# Altium PCB TP-SENSOR-15x10-CH-R01.PcbDoc (part 2 of 2)
Units mm, origin at the board's own origin, x right, y up, seen from the top; angles counter-clockwise.
Board outline 129.4 x 79.4 mm, 2 copper layers (Top Layer, Bottom Layer), stack 0.98 mm thick; 26 components, 26 nets, 61 pads, 358 vias.
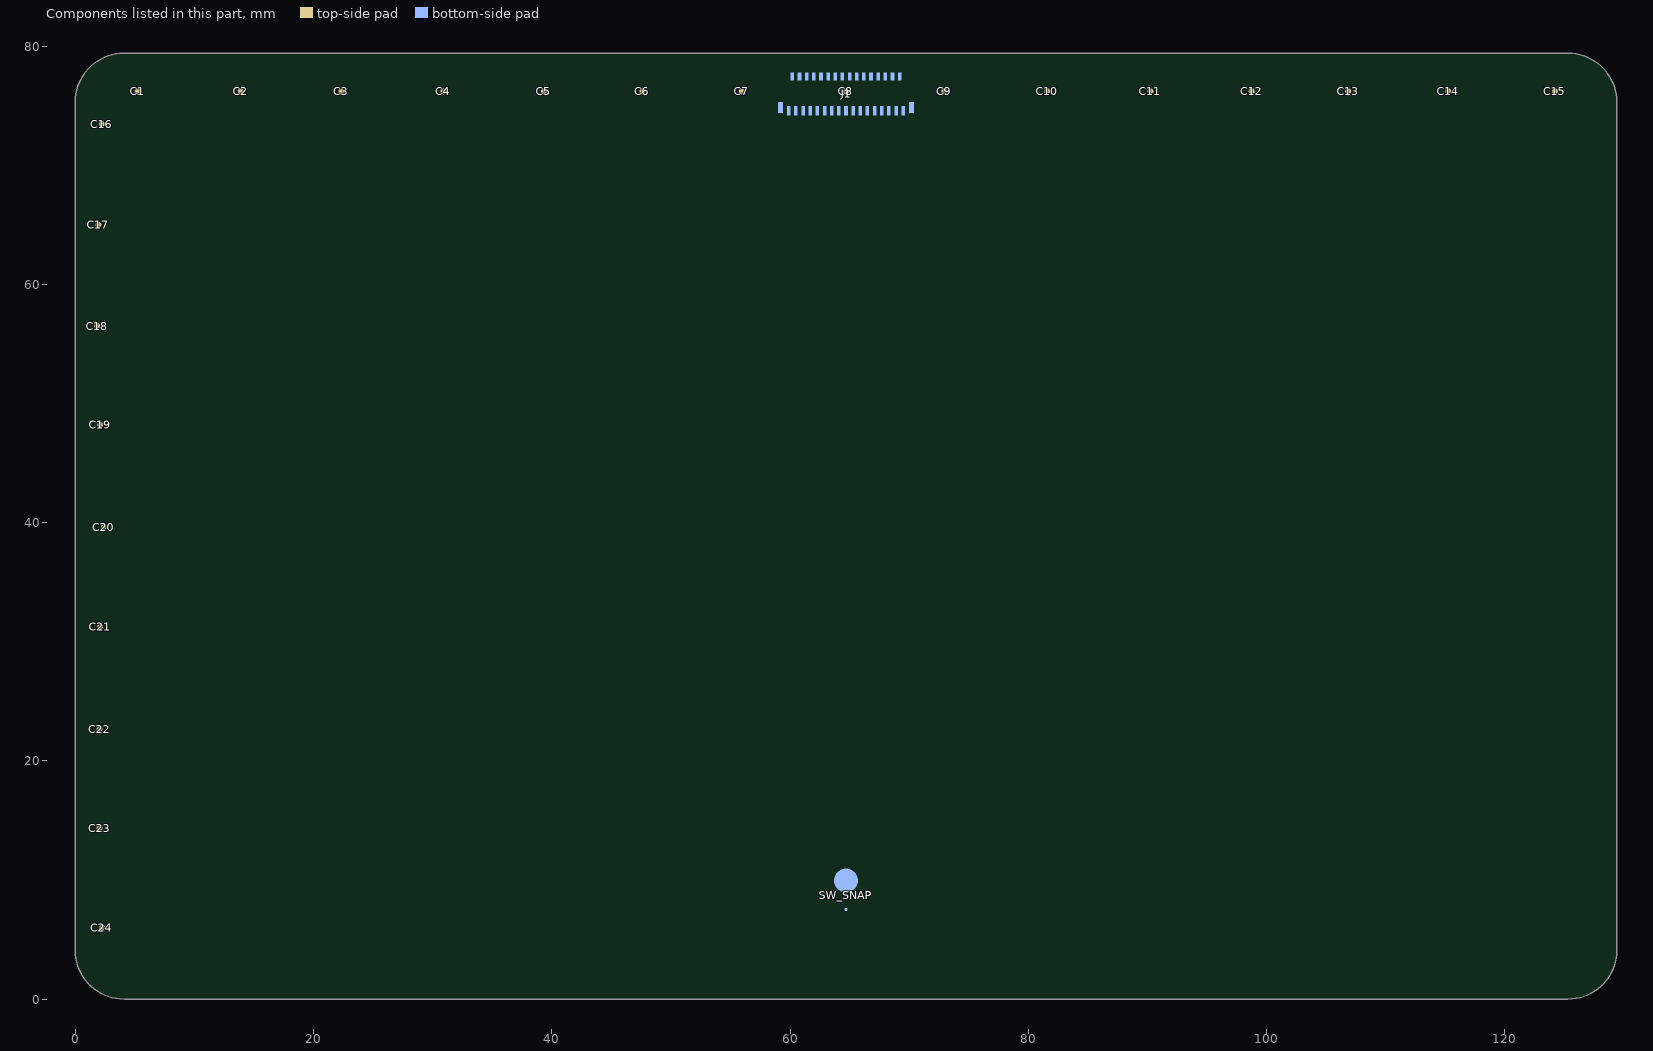
[diagram p2: the components of this part, seen from the top]

## Polygon pours and split planes (outlines as drawn) (continued)
TP-SENS-TX10 on Top Layer "NONET_L04_P-001" (solid, pour order 252): 90.201,64.901 86.251,60.952 86.251,60.95 86.252,60.95 90.201,57.001 94.15,60.95 94.151,60.95
TP-SENS-TX9 on Top Layer "NONET_L04_P-001" (solid, pour order 249): 77.751,77.949 81.7,74 81.702,74 85.651,77.949
TP-SENS-TX9 on Top Layer "NONET_L04_P-001" (solid, pour order 248): 81.701,13.901 77.751,9.952 77.751,9.95 77.752,9.95 81.701,6.001 85.65,9.95 85.651,9.95
TP-SENS-TX9 on Top Layer "NONET_L04_P-001" (solid, pour order 247): 81.701,22.401 77.751,18.452 77.751,18.45 77.752,18.45 81.701,14.501 85.65,18.45 85.651,18.45
TP-SENS-TX9 on Top Layer "NONET_L04_P-001" (solid, pour order 246): 81.701,30.901 77.751,26.952 77.751,26.95 77.752,26.95 81.701,23.001 85.65,26.95 85.651,26.95
TP-SENS-TX9 on Top Layer "NONET_L04_P-001" (solid, pour order 245): 81.701,39.401 77.751,35.452 77.751,35.45 77.752,35.45 81.701,31.501 85.65,35.45 85.651,35.45
TP-SENS-TX9 on Top Layer "NONET_L04_P-001" (solid, pour order 244): 81.701,47.901 77.751,43.952 77.751,43.95 77.752,43.95 81.701,40.001 85.65,43.95 85.651,43.95
TP-SENS-TX9 on Top Layer "NONET_L04_P-001" (solid, pour order 243): 81.701,56.401 77.751,52.452 77.751,52.45 77.752,52.45 81.701,48.501 85.65,52.45 85.651,52.45
TP-SENS-TX9 on Top Layer "NONET_L04_P-001" (solid, pour order 241): 81.701,73.4 77.751,69.451 77.751,69.449 77.752,69.449 81.701,65.5 85.65,69.449 85.651,69.449
TP-SENS-TX8 on Top Layer "NONET_L04_P-001" (solid, pour order 240): 69.242,1.421 73.19,5.369 73.193,5.369 77.142,1.42
TP-SENS-TX8 on Top Layer "NONET_L04_P-001" (solid, pour order 239): 69.251,77.949 73.2,74 73.202,74 77.151,77.949
TP-SENS-TX8 on Top Layer "NONET_L04_P-001" (solid, pour order 238): 73.201,13.901 69.251,9.952 69.251,9.95 69.252,9.95 73.201,6.001 77.15,9.95 77.151,9.95
TP-SENS-TX8 on Top Layer "NONET_L04_P-001" (solid, pour order 237): 73.201,22.401 69.251,18.452 69.251,18.45 69.252,18.45 73.201,14.501 77.15,18.45 77.151,18.45
TP-SENS-TX8 on Top Layer "NONET_L04_P-001" (solid, pour order 236): 73.201,30.901 69.251,26.952 69.251,26.95 69.252,26.95 73.201,23.001 77.15,26.95 77.151,26.95
TP-SENS-TX8 on Top Layer "NONET_L04_P-001" (solid, pour order 235): 73.201,39.401 69.251,35.452 69.251,35.45 69.252,35.45 73.201,31.501 77.15,35.45 77.151,35.45
TP-SENS-TX8 on Top Layer "NONET_L04_P-001" (solid, pour order 234): 73.201,47.901 69.251,43.952 69.251,43.95 69.252,43.95 73.201,40.001 77.15,43.95 77.151,43.95
TP-SENS-TX8 on Top Layer "NONET_L04_P-001" (solid, pour order 233): 73.201,56.401 69.251,52.452 69.251,52.45 69.252,52.45 73.201,48.501 77.15,52.45 77.151,52.45
TP-SENS-TX8 on Top Layer "NONET_L04_P-001" (solid, pour order 232): 73.201,64.901 69.251,60.952 69.251,60.95 69.252,60.95 73.201,57.001 77.15,60.95 77.151,60.95
TP-SENS-TX8 on Top Layer "NONET_L04_P-001" (solid, pour order 231): 73.201,73.4 69.251,69.451 69.251,69.449 69.252,69.449 73.201,65.5 77.15,69.449 77.151,69.449
TP-SENS-TX7 on Top Layer "NONET_L04_P-001" (solid, pour order 230): 60.742,1.421 64.69,5.369 64.693,5.369 68.642,1.42
TP-SENS-TX7 on Top Layer "NONET_L04_P-001" (solid, pour order 229): 60.751,77.949 64.7,74 64.702,74 68.651,77.949
TP-SENS-TX7 on Top Layer "NONET_L04_P-001" (solid, pour order 227): 64.701,22.401 60.751,18.452 60.751,18.45 60.752,18.45 64.701,14.501 68.65,18.45 68.651,18.45
TP-SENS-TX7 on Top Layer "NONET_L04_P-001" (solid, pour order 226): 64.701,30.901 60.751,26.952 60.751,26.95 60.752,26.95 64.701,23.001 68.65,26.95 68.651,26.95
TP-SENS-TX7 on Top Layer "NONET_L04_P-001" (solid, pour order 225): 64.701,39.401 60.751,35.452 60.751,35.45 60.752,35.45 64.701,31.501 68.65,35.45 68.651,35.45
TP-SENS-TX7 on Top Layer "NONET_L04_P-001" (solid, pour order 224): 64.701,47.901 60.751,43.952 60.751,43.95 60.752,43.95 64.701,40.001 68.65,43.95 68.651,43.95
TP-SENS-TX7 on Top Layer "NONET_L04_P-001" (solid, pour order 223): 64.701,56.401 60.751,52.452 60.751,52.45 60.752,52.45 64.701,48.501 68.65,52.45 68.651,52.45
TP-SENS-TX7 on Top Layer "NONET_L04_P-001" (solid, pour order 222): 64.701,64.901 60.751,60.952 60.751,60.95 60.752,60.95 64.701,57.001 68.65,60.95 68.651,60.95
TP-SENS-TX6 on Top Layer "NONET_L04_P-001" (solid, pour order 220): 52.242,1.421 56.19,5.369 56.193,5.369 60.142,1.42
TP-SENS-TX6 on Top Layer "NONET_L04_P-001" (solid, pour order 219): 52.251,77.949 56.2,74 56.202,74 60.151,77.949
TP-SENS-TX6 on Top Layer "NONET_L04_P-001" (solid, pour order 217): 56.201,22.401 52.251,18.452 52.251,18.45 52.252,18.45 56.201,14.501 60.15,18.45 60.151,18.45
TP-SENS-TX6 on Top Layer "NONET_L04_P-001" (solid, pour order 216): 56.201,30.901 52.251,26.952 52.251,26.95 52.252,26.95 56.201,23.001 60.15,26.95 60.151,26.95
TP-SENS-TX6 on Top Layer "NONET_L04_P-001" (solid, pour order 215): 56.201,39.401 52.251,35.452 52.251,35.45 52.252,35.45 56.201,31.501 60.15,35.45 60.151,35.45
TP-SENS-TX6 on Top Layer "NONET_L04_P-001" (solid, pour order 214): 56.201,47.901 52.251,43.952 52.251,43.95 52.252,43.95 56.201,40.001 60.15,43.95 60.151,43.95
TP-SENS-TX6 on Top Layer "NONET_L04_P-001" (solid, pour order 213): 56.201,56.401 52.251,52.452 52.251,52.45 52.252,52.45 56.201,48.501 60.15,52.45 60.151,52.45
TP-SENS-TX6 on Top Layer "NONET_L04_P-001" (solid, pour order 212): 56.201,64.901 52.251,60.952 52.251,60.95 52.252,60.95 56.201,57.001 60.15,60.95 60.151,60.95
TP-SENS-TX6 on Top Layer "NONET_L04_P-001" (solid, pour order 211): 56.201,73.4 52.251,69.451 52.251,69.449 52.252,69.449 56.201,65.5 60.15,69.449 60.151,69.449
TP-SENS-TX5 on Top Layer "NONET_L04_P-001" (solid, pour order 210): 43.742,1.421 47.69,5.369 47.693,5.369 51.642,1.42
TP-SENS-TX5 on Top Layer "NONET_L04_P-001" (solid, pour order 209): 43.751,77.949 47.7,74 47.702,74 51.651,77.949
TP-SENS-TX5 on Top Layer "NONET_L04_P-001" (solid, pour order 208): 47.701,13.901 43.751,9.952 43.751,9.95 43.752,9.95 47.701,6.001 51.65,9.95 51.651,9.95
TP-SENS-TX5 on Top Layer "NONET_L04_P-001" (solid, pour order 207): 47.701,22.401 43.751,18.452 43.751,18.45 43.752,18.45 47.701,14.501 51.65,18.45 51.651,18.45
TP-SENS-TX5 on Top Layer "NONET_L04_P-001" (solid, pour order 206): 47.701,30.901 43.751,26.952 43.751,26.95 43.752,26.95 47.701,23.001 51.65,26.95 51.651,26.95
TP-SENS-TX5 on Top Layer "NONET_L04_P-001" (solid, pour order 205): 47.701,39.401 43.751,35.452 43.751,35.45 43.752,35.45 47.701,31.501 51.65,35.45 51.651,35.45
TP-SENS-TX5 on Top Layer "NONET_L04_P-001" (solid, pour order 204): 47.701,47.901 43.751,43.952 43.751,43.95 43.752,43.95 47.701,40.001 51.65,43.95 51.651,43.95
TP-SENS-TX5 on Top Layer "NONET_L04_P-001" (solid, pour order 203): 47.701,56.401 43.751,52.452 43.751,52.45 43.752,52.45 47.701,48.501 51.65,52.45 51.651,52.45
TP-SENS-TX5 on Top Layer "NONET_L04_P-001" (solid, pour order 202): 47.701,64.901 43.751,60.952 43.751,60.95 43.752,60.95 47.701,57.001 51.65,60.95 51.651,60.95
TP-SENS-TX5 on Top Layer "NONET_L04_P-001" (solid, pour order 201): 47.701,73.4 43.751,69.451 43.751,69.449 43.752,69.449 47.701,65.5 51.65,69.449 51.651,69.449
TP-SENS-TX4 on Top Layer "NONET_L04_P-001" (solid, pour order 200): 35.242,1.421 39.19,5.369 39.193,5.369 43.142,1.42
TP-SENS-TX4 on Top Layer "NONET_L04_P-001" (solid, pour order 199): 35.251,77.949 39.2,74 39.202,74 43.151,77.949
TP-SENS-TX4 on Top Layer "NONET_L04_P-001" (solid, pour order 198): 39.201,13.901 35.251,9.952 35.251,9.95 35.252,9.95 39.201,6.001 43.15,9.95 43.151,9.95
TP-SENS-TX4 on Top Layer "NONET_L04_P-001" (solid, pour order 197): 39.201,22.401 35.251,18.452 35.251,18.45 35.252,18.45 39.201,14.501 43.15,18.45 43.151,18.45
TP-SENS-TX4 on Top Layer "NONET_L04_P-001" (solid, pour order 196): 39.201,30.901 35.251,26.952 35.251,26.95 35.252,26.95 39.201,23.001 43.15,26.95 43.151,26.95
TP-SENS-TX4 on Top Layer "NONET_L04_P-001" (solid, pour order 195): 39.201,39.401 35.251,35.452 35.251,35.45 35.252,35.45 39.201,31.501 43.15,35.45 43.151,35.45
TP-SENS-TX4 on Top Layer "NONET_L04_P-001" (solid, pour order 194): 39.201,47.901 35.251,43.952 35.251,43.95 35.252,43.95 39.201,40.001 43.15,43.95 43.151,43.95
TP-SENS-TX4 on Top Layer "NONET_L04_P-001" (solid, pour order 193): 39.201,56.401 35.251,52.452 35.251,52.45 35.252,52.45 39.201,48.501 43.15,52.45 43.151,52.45
TP-SENS-TX4 on Top Layer "NONET_L04_P-001" (solid, pour order 192): 39.201,64.901 35.251,60.952 35.251,60.95 35.252,60.95 39.201,57.001 43.15,60.95 43.151,60.95
TP-SENS-TX4 on Top Layer "NONET_L04_P-001" (solid, pour order 191): 39.201,73.4 35.251,69.451 35.251,69.449 35.252,69.449 39.201,65.5 43.15,69.449 43.151,69.449
TP-SENS-TX3 on Top Layer "NONET_L04_P-001" (solid, pour order 190): 26.742,1.421 30.69,5.369 30.693,5.369 34.642,1.42
TP-SENS-TX3 on Top Layer "NONET_L04_P-001" (solid, pour order 189): 26.751,77.949 30.7,74 30.702,74 34.651,77.949
TP-SENS-TX3 on Top Layer "NONET_L04_P-001" (solid, pour order 188): 30.701,13.901 26.751,9.952 26.751,9.95 26.752,9.95 30.701,6.001 34.65,9.95 34.651,9.95
TP-SENS-TX3 on Top Layer "NONET_L04_P-001" (solid, pour order 187): 30.701,22.401 26.751,18.452 26.751,18.45 26.752,18.45 30.701,14.501 34.65,18.45 34.651,18.45
TP-SENS-TX3 on Top Layer "NONET_L04_P-001" (solid, pour order 186): 30.701,30.901 26.751,26.952 26.751,26.95 26.752,26.95 30.701,23.001 34.65,26.95 34.651,26.95
TP-SENS-TX3 on Top Layer "NONET_L04_P-001" (solid, pour order 185): 30.701,39.401 26.751,35.452 26.751,35.45 26.752,35.45 30.701,31.501 34.65,35.45 34.651,35.45
TP-SENS-TX3 on Top Layer "NONET_L04_P-001" (solid, pour order 184): 30.701,47.901 26.751,43.952 26.751,43.95 26.752,43.95 30.701,40.001 34.65,43.95 34.651,43.95
TP-SENS-TX3 on Top Layer "NONET_L04_P-001" (solid, pour order 183): 30.701,56.401 26.751,52.452 26.751,52.45 26.752,52.45 30.701,48.501 34.65,52.45 34.651,52.45
TP-SENS-TX3 on Top Layer "NONET_L04_P-001" (solid, pour order 182): 30.701,64.901 26.751,60.952 26.751,60.95 26.752,60.95 30.701,57.001 34.65,60.95 34.651,60.95
TP-SENS-TX3 on Top Layer "NONET_L04_P-001" (solid, pour order 181): 30.701,73.4 26.751,69.451 26.751,69.449 26.752,69.449 30.701,65.5 34.65,69.449 34.651,69.449
TP-SENS-TX2 on Top Layer "NONET_L04_P-001" (solid, pour order 180): 18.242,1.421 22.19,5.369 22.193,5.369 26.142,1.42
TP-SENS-TX2 on Top Layer "NONET_L04_P-001" (solid, pour order 179): 18.251,77.949 22.2,74 22.202,74 26.151,77.949
TP-SENS-TX2 on Top Layer "NONET_L04_P-001" (solid, pour order 178): 22.201,13.901 18.251,9.952 18.251,9.95 18.252,9.95 22.201,6.001 26.15,9.95 26.151,9.95
TP-SENS-TX2 on Top Layer "NONET_L04_P-001" (solid, pour order 177): 22.201,22.401 18.251,18.452 18.251,18.45 18.252,18.45 22.201,14.501 26.15,18.45 26.151,18.45
TP-SENS-TX2 on Top Layer "NONET_L04_P-001" (solid, pour order 176): 22.201,30.901 18.251,26.952 18.251,26.95 18.252,26.95 22.201,23.001 26.15,26.95 26.151,26.95
TP-SENS-TX2 on Top Layer "NONET_L04_P-001" (solid, pour order 175): 22.201,39.401 18.251,35.452 18.251,35.45 18.252,35.45 22.201,31.501 26.15,35.45 26.151,35.45
TP-SENS-TX2 on Top Layer "NONET_L04_P-001" (solid, pour order 174): 22.201,47.901 18.251,43.952 18.251,43.95 18.252,43.95 22.201,40.001 26.15,43.95 26.151,43.95
TP-SENS-TX2 on Top Layer "NONET_L04_P-001" (solid, pour order 173): 22.201,56.401 18.251,52.452 18.251,52.45 18.252,52.45 22.201,48.501 26.15,52.45 26.151,52.45
TP-SENS-TX2 on Top Layer "NONET_L04_P-001" (solid, pour order 172): 22.201,64.901 18.251,60.952 18.251,60.95 18.252,60.95 22.201,57.001 26.15,60.95 26.151,60.95
TP-SENS-TX2 on Top Layer "NONET_L04_P-001" (solid, pour order 171): 22.201,73.4 18.251,69.451 18.251,69.449 18.252,69.449 22.201,65.5 26.15,69.449 26.151,69.449
TP-SENS-TX1 on Top Layer "NONET_L04_P-001" (solid, pour order 170): 9.742,1.421 13.69,5.369 13.693,5.369 17.642,1.42
TP-SENS-TX1 on Top Layer "NONET_L04_P-001" (solid, pour order 169): 9.751,77.949 13.7,74 13.702,74 17.651,77.949
TP-SENS-TX1 on Top Layer "NONET_L04_P-001" (solid, pour order 168): 13.701,13.901 9.751,9.952 9.751,9.95 9.752,9.95 13.701,6.001 17.65,9.95 17.651,9.95
TP-SENS-TX1 on Top Layer "NONET_L04_P-001" (solid, pour order 167): 13.701,22.401 9.751,18.452 9.751,18.45 9.752,18.45 13.701,14.501 17.65,18.45 17.651,18.45
TP-SENS-TX1 on Top Layer "NONET_L04_P-001" (solid, pour order 166): 13.701,30.901 9.751,26.952 9.751,26.95 9.752,26.95 13.701,23.001 17.65,26.95 17.651,26.95
TP-SENS-TX1 on Top Layer "NONET_L04_P-001" (solid, pour order 165): 13.701,39.401 9.751,35.452 9.751,35.45 9.752,35.45 13.701,31.501 17.65,35.45 17.651,35.45
TP-SENS-TX1 on Top Layer "NONET_L04_P-001" (solid, pour order 164): 13.701,47.901 9.751,43.952 9.751,43.95 9.752,43.95 13.701,40.001 17.65,43.95 17.651,43.95
TP-SENS-TX1 on Top Layer "NONET_L04_P-001" (solid, pour order 163): 13.701,56.401 9.751,52.452 9.751,52.45 9.752,52.45 13.701,48.501 17.65,52.45 17.651,52.45
TP-SENS-TX1 on Top Layer "NONET_L04_P-001" (solid, pour order 162): 13.701,64.901 9.751,60.952 9.751,60.95 9.752,60.95 13.701,57.001 17.65,60.95 17.651,60.95
TP-SENS-TX1 on Top Layer "NONET_L04_P-001" (solid, pour order 161): 13.701,73.4 9.751,69.451 9.751,69.449 9.752,69.449 13.701,65.5 17.65,69.449 17.651,69.449
TP-SENS-RX8 on Top Layer "NONET_L04_P-001" (solid, pour order 159): 115.999,5.699 119.948,1.749 119.95,1.749 123.899,5.699 119.95,9.648 119.95,9.649
TP-SENS-RX8 on Top Layer "NONET_L04_P-001" (solid, pour order 158): 107.499,5.699 111.448,1.749 111.45,1.749 115.399,5.699 111.45,9.648 111.45,9.649
TP-SENS-RX8 on Top Layer "NONET_L04_P-001" (solid, pour order 157): 98.999,5.699 102.948,1.749 102.95,1.749 106.899,5.699 102.95,9.648 102.95,9.649
TP-SENS-RX8 on Top Layer "NONET_L04_P-001" (solid, pour order 156): 90.499,5.699 94.448,1.749 94.45,1.749 98.399,5.699 94.45,9.648 94.45,9.649
TP-SENS-RX8 on Top Layer "NONET_L04_P-001" (solid, pour order 155): 81.999,5.699 85.948,1.749 85.95,1.749 89.899,5.699 85.95,9.648 85.95,9.649
TP-SENS-RX8 on Top Layer "NONET_L04_P-001" (solid, pour order 154): 73.499,5.699 77.448,1.749 77.45,1.749 81.399,5.699 77.45,9.648 77.45,9.649
TP-SENS-RX8 on Top Layer "NONET_L04_P-001" (solid, pour order 151): 47.999,5.699 51.948,1.749 51.95,1.749 55.899,5.699 51.95,9.648 51.95,9.649
TP-SENS-RX8 on Top Layer "NONET_L04_P-001" (solid, pour order 150): 39.499,5.699 43.448,1.749 43.45,1.749 47.399,5.699 43.45,9.648 43.45,9.649
TP-SENS-RX8 on Top Layer "NONET_L04_P-001" (solid, pour order 149): 30.999,5.699 34.948,1.749 34.95,1.749 38.899,5.699 34.95,9.648 34.95,9.649
TP-SENS-RX8 on Top Layer "NONET_L04_P-001" (solid, pour order 148): 22.499,5.699 26.448,1.749 26.45,1.749 30.399,5.699 26.45,9.648 26.45,9.649
TP-SENS-RX8 on Top Layer "NONET_L04_P-001" (solid, pour order 147): 13.999,5.699 17.948,1.749 17.95,1.749 21.899,5.699 17.95,9.648 17.95,9.649
TP-SENS-RX8 on Top Layer "NONET_L04_P-001" (solid, pour order 146): 5.499,5.699 9.448,1.749 9.45,1.749 13.399,5.699 9.45,9.648 9.45,9.649
TP-SENS-RX7 on Top Layer "NONET_L04_P-001" (solid, pour order 144): 128.449,18.148 124.5,14.199 124.5,14.196 128.449,10.248
TP-SENS-RX7 on Top Layer "NONET_L04_P-001" (solid, pour order 143): 115.999,14.199 119.948,10.249 119.95,10.249 123.899,14.199 119.95,18.148 119.95,18.149
TP-SENS-RX7 on Top Layer "NONET_L04_P-001" (solid, pour order 142): 107.499,14.199 111.448,10.249 111.45,10.249 115.399,14.199 111.45,18.148 111.45,18.149
TP-SENS-RX7 on Top Layer "NONET_L04_P-001" (solid, pour order 141): 98.999,14.199 102.948,10.249 102.95,10.249 106.899,14.199 102.95,18.148 102.95,18.149
TP-SENS-RX7 on Top Layer "NONET_L04_P-001" (solid, pour order 140): 90.499,14.199 94.448,10.249 94.45,10.249 98.399,14.199 94.45,18.148 94.45,18.149
TP-SENS-RX7 on Top Layer "NONET_L04_P-001" (solid, pour order 139): 81.999,14.199 85.948,10.249 85.95,10.249 89.899,14.199 85.95,18.148 85.95,18.149
TP-SENS-RX7 on Top Layer "NONET_L04_P-001" (solid, pour order 138): 73.499,14.199 77.448,10.249 77.45,10.249 81.399,14.199 77.45,18.148 77.45,18.149
TP-SENS-RX7 on Top Layer "NONET_L04_P-001" (solid, pour order 135): 47.999,14.199 51.948,10.249 51.95,10.249 55.899,14.199 51.95,18.148 51.95,18.149
TP-SENS-RX7 on Top Layer "NONET_L04_P-001" (solid, pour order 134): 39.499,14.199 43.448,10.249 43.45,10.249 47.399,14.199 43.45,18.148 43.45,18.149
TP-SENS-RX7 on Top Layer "NONET_L04_P-001" (solid, pour order 133): 30.999,14.199 34.948,10.249 34.95,10.249 38.899,14.199 34.95,18.148 34.95,18.149
TP-SENS-RX7 on Top Layer "NONET_L04_P-001" (solid, pour order 132): 22.499,14.199 26.448,10.249 26.45,10.249 30.399,14.199 26.45,18.148 26.45,18.149
TP-SENS-RX7 on Top Layer "NONET_L04_P-001" (solid, pour order 131): 13.999,14.199 17.948,10.249 17.95,10.249 21.899,14.199 17.95,18.148 17.95,18.149
TP-SENS-RX7 on Top Layer "NONET_L04_P-001" (solid, pour order 130): 5.499,14.199 9.448,10.249 9.45,10.249 13.399,14.199 9.45,18.148 9.45,18.149
TP-SENS-RX7 on Top Layer "NONET_L04_P-001" (solid, pour order 129): 0.951,10.249 4.9,14.198 4.9,14.2 0.951,18.149
TP-SENS-RX6 on Top Layer "NONET_L04_P-001" (solid, pour order 128): 128.449,26.648 124.5,22.699 124.5,22.696 128.449,18.748
TP-SENS-RX6 on Top Layer "NONET_L04_P-001" (solid, pour order 127): 115.999,22.699 119.948,18.749 119.95,18.749 123.899,22.699 119.95,26.648 119.95,26.649
TP-SENS-RX6 on Top Layer "NONET_L04_P-001" (solid, pour order 126): 107.499,22.699 111.448,18.749 111.45,18.749 115.399,22.699 111.45,26.648 111.45,26.649
TP-SENS-RX6 on Top Layer "NONET_L04_P-001" (solid, pour order 125): 98.999,22.699 102.948,18.749 102.95,18.749 106.899,22.699 102.95,26.648 102.95,26.649
TP-SENS-RX6 on Top Layer "NONET_L04_P-001" (solid, pour order 124): 90.499,22.699 94.448,18.749 94.45,18.749 98.399,22.699 94.45,26.648 94.45,26.649
TP-SENS-RX6 on Top Layer "NONET_L04_P-001" (solid, pour order 123): 81.999,22.699 85.948,18.749 85.95,18.749 89.899,22.699 85.95,26.648 85.95,26.649
TP-SENS-RX6 on Top Layer "NONET_L04_P-001" (solid, pour order 122): 73.499,22.699 77.448,18.749 77.45,18.749 81.399,22.699 77.45,26.648 77.45,26.649
TP-SENS-RX6 on Top Layer "NONET_L04_P-001" (solid, pour order 121): 64.999,22.699 68.948,18.749 68.95,18.749 72.899,22.699 68.95,26.648 68.95,26.649
TP-SENS-RX6 on Top Layer "NONET_L04_P-001" (solid, pour order 120): 56.499,22.699 60.448,18.749 60.45,18.749 64.399,22.699 60.45,26.648 60.45,26.649
TP-SENS-RX6 on Top Layer "NONET_L04_P-001" (solid, pour order 119): 47.999,22.699 51.948,18.749 51.95,18.749 55.899,22.699 51.95,26.648 51.95,26.649
TP-SENS-RX6 on Top Layer "NONET_L04_P-001" (solid, pour order 118): 39.499,22.699 43.448,18.749 43.45,18.749 47.399,22.699 43.45,26.648 43.45,26.649
TP-SENS-RX6 on Top Layer "NONET_L04_P-001" (solid, pour order 117): 30.999,22.699 34.948,18.749 34.95,18.749 38.899,22.699 34.95,26.648 34.95,26.649
TP-SENS-RX6 on Top Layer "NONET_L04_P-001" (solid, pour order 116): 22.499,22.699 26.448,18.749 26.45,18.749 30.399,22.699 26.45,26.648 26.45,26.649
TP-SENS-RX6 on Top Layer "NONET_L04_P-001" (solid, pour order 115): 13.999,22.699 17.948,18.749 17.95,18.749 21.899,22.699 17.95,26.648 17.95,26.649
TP-SENS-RX6 on Top Layer "NONET_L04_P-001" (solid, pour order 114): 5.499,22.699 9.448,18.749 9.45,18.749 13.399,22.699 9.45,26.648 9.45,26.649
TP-SENS-RX6 on Top Layer "NONET_L04_P-001" (solid, pour order 113): 0.951,18.749 4.9,22.698 4.9,22.7 0.951,26.649
TP-SENS-RX5 on Top Layer "NONET_L04_P-001" (solid, pour order 112): 128.449,35.148 124.5,31.199 124.5,31.196 128.449,27.248
TP-SENS-RX5 on Top Layer "NONET_L04_P-001" (solid, pour order 111): 115.999,31.199 119.948,27.249 119.95,27.249 123.899,31.199 119.95,35.148 119.95,35.149
TP-SENS-RX5 on Top Layer "NONET_L04_P-001" (solid, pour order 110): 107.499,31.199 111.448,27.249 111.45,27.249 115.399,31.199 111.45,35.148 111.45,35.149
TP-SENS-RX5 on Top Layer "NONET_L04_P-001" (solid, pour order 109): 98.999,31.199 102.948,27.249 102.95,27.249 106.899,31.199 102.95,35.148 102.95,35.149
TP-SENS-RX5 on Top Layer "NONET_L04_P-001" (solid, pour order 108): 90.499,31.199 94.448,27.249 94.45,27.249 98.399,31.199 94.45,35.148 94.45,35.149
TP-SENS-RX5 on Top Layer "NONET_L04_P-001" (solid, pour order 107): 81.999,31.199 85.948,27.249 85.95,27.249 89.899,31.199 85.95,35.148 85.95,35.149
TP-SENS-RX5 on Top Layer "NONET_L04_P-001" (solid, pour order 106): 73.499,31.199 77.448,27.249 77.45,27.249 81.399,31.199 77.45,35.148 77.45,35.149
TP-SENS-RX5 on Top Layer "NONET_L04_P-001" (solid, pour order 105): 64.999,31.199 68.948,27.249 68.95,27.249 72.899,31.199 68.95,35.148 68.95,35.149
TP-SENS-RX5 on Top Layer "NONET_L04_P-001" (solid, pour order 104): 56.499,31.199 60.448,27.249 60.45,27.249 64.399,31.199 60.45,35.148 60.45,35.149
TP-SENS-RX5 on Top Layer "NONET_L04_P-001" (solid, pour order 103): 47.999,31.199 51.948,27.249 51.95,27.249 55.899,31.199 51.95,35.148 51.95,35.149
TP-SENS-RX5 on Top Layer "NONET_L04_P-001" (solid, pour order 102): 39.499,31.199 43.448,27.249 43.45,27.249 47.399,31.199 43.45,35.148 43.45,35.149
TP-SENS-RX5 on Top Layer "NONET_L04_P-001" (solid, pour order 101): 30.999,31.199 34.948,27.249 34.95,27.249 38.899,31.199 34.95,35.148 34.95,35.149
TP-SENS-RX5 on Top Layer "NONET_L04_P-001" (solid, pour order 100): 22.499,31.199 26.448,27.249 26.45,27.249 30.399,31.199 26.45,35.148 26.45,35.149
TP-SENS-RX5 on Top Layer "NONET_L04_P-001" (solid, pour order 99): 13.999,31.199 17.948,27.249 17.95,27.249 21.899,31.199 17.95,35.148 17.95,35.149
TP-SENS-RX5 on Top Layer "NONET_L04_P-001" (solid, pour order 98): 5.499,31.199 9.448,27.249 9.45,27.249 13.399,31.199 9.45,35.148 9.45,35.149
TP-SENS-RX5 on Top Layer "NONET_L04_P-001" (solid, pour order 97): 0.951,27.249 4.9,31.198 4.9,31.2 0.951,35.149
TP-SENS-RX4 on Top Layer "NONET_L04_P-001" (solid, pour order 95): 115.999,39.699 119.948,35.749 119.95,35.749 123.899,39.699 119.95,43.648 119.95,43.649
TP-SENS-RX4 on Top Layer "NONET_L04_P-001" (solid, pour order 94): 107.499,39.699 111.448,35.749 111.45,35.749 115.399,39.699 111.45,43.648 111.45,43.649
TP-SENS-RX4 on Top Layer "NONET_L04_P-001" (solid, pour order 93): 98.999,39.699 102.948,35.749 102.95,35.749 106.899,39.699 102.95,43.648 102.95,43.649
TP-SENS-RX4 on Top Layer "NONET_L04_P-001" (solid, pour order 92): 90.499,39.699 94.448,35.749 94.45,35.749 98.399,39.699 94.45,43.648 94.45,43.649
TP-SENS-RX4 on Top Layer "NONET_L04_P-001" (solid, pour order 91): 81.999,39.699 85.948,35.749 85.95,35.749 89.899,39.699 85.95,43.648 85.95,43.649
TP-SENS-RX4 on Top Layer "NONET_L04_P-001" (solid, pour order 90): 73.499,39.699 77.448,35.749 77.45,35.749 81.399,39.699 77.45,43.648 77.45,43.649
TP-SENS-RX4 on Top Layer "NONET_L04_P-001" (solid, pour order 89): 64.999,39.699 68.948,35.749 68.95,35.749 72.899,39.699 68.95,43.648 68.95,43.649
TP-SENS-RX4 on Top Layer "NONET_L04_P-001" (solid, pour order 88): 56.499,39.699 60.448,35.749 60.45,35.749 64.399,39.699 60.45,43.648 60.45,43.649
TP-SENS-RX4 on Top Layer "NONET_L04_P-001" (solid, pour order 87): 47.999,39.699 51.948,35.749 51.95,35.749 55.899,39.699 51.95,43.648 51.95,43.649
TP-SENS-RX4 on Top Layer "NONET_L04_P-001" (solid, pour order 86): 39.499,39.699 43.448,35.749 43.45,35.749 47.399,39.699 43.45,43.648 43.45,43.649
TP-SENS-RX4 on Top Layer "NONET_L04_P-001" (solid, pour order 85): 30.999,39.699 34.948,35.749 34.95,35.749 38.899,39.699 34.95,43.648 34.95,43.649
TP-SENS-RX4 on Top Layer "NONET_L04_P-001" (solid, pour order 84): 22.499,39.699 26.448,35.749 26.45,35.749 30.399,39.699 26.45,43.648 26.45,43.649
TP-SENS-RX4 on Top Layer "NONET_L04_P-001" (solid, pour order 83): 13.999,39.699 17.948,35.749 17.95,35.749 21.899,39.699 17.95,43.648 17.95,43.649
TP-SENS-RX4 on Top Layer "NONET_L04_P-001" (solid, pour order 82): 5.499,39.699 9.448,35.749 9.45,35.749 13.399,39.699 9.45,43.648 9.45,43.649
TP-SENS-RX4 on Top Layer "NONET_L04_P-001" (solid, pour order 81): 0.951,35.749 4.9,39.698 4.9,39.7 0.951,43.649
TP-SENS-RX3 on Top Layer "NONET_L04_P-001" (solid, pour order 80): 128.449,52.148 124.5,48.199 124.5,48.196 128.449,44.248
TP-SENS-RX3 on Top Layer "NONET_L04_P-001" (solid, pour order 79): 115.999,48.199 119.948,44.249 119.95,44.249 123.899,48.199 119.95,52.148 119.95,52.149
TP-SENS-RX3 on Top Layer "NONET_L04_P-001" (solid, pour order 78): 107.499,48.199 111.448,44.249 111.45,44.249 115.399,48.199 111.45,52.148 111.45,52.149
TP-SENS-RX3 on Top Layer "NONET_L04_P-001" (solid, pour order 77): 98.999,48.199 102.948,44.249 102.95,44.249 106.899,48.199 102.95,52.148 102.95,52.149
TP-SENS-RX3 on Top Layer "NONET_L04_P-001" (solid, pour order 76): 90.499,48.199 94.448,44.249 94.45,44.249 98.399,48.199 94.45,52.148 94.45,52.149
TP-SENS-RX3 on Top Layer "NONET_L04_P-001" (solid, pour order 74): 73.499,48.199 77.448,44.249 77.45,44.249 81.399,48.199 77.45,52.148 77.45,52.149
TP-SENS-RX3 on Top Layer "NONET_L04_P-001" (solid, pour order 73): 64.999,48.199 68.948,44.249 68.95,44.249 72.899,48.199 68.95,52.148 68.95,52.149
TP-SENS-RX3 on Top Layer "NONET_L04_P-001" (solid, pour order 72): 56.499,48.199 60.448,44.249 60.45,44.249 64.399,48.199 60.45,52.148 60.45,52.149
TP-SENS-RX3 on Top Layer "NONET_L04_P-001" (solid, pour order 71): 47.999,48.199 51.948,44.249 51.95,44.249 55.899,48.199 51.95,52.148 51.95,52.149
TP-SENS-RX3 on Top Layer "NONET_L04_P-001" (solid, pour order 70): 39.499,48.199 43.448,44.249 43.45,44.249 47.399,48.199 43.45,52.148 43.45,52.149
TP-SENS-RX3 on Top Layer "NONET_L04_P-001" (solid, pour order 69): 30.999,48.199 34.948,44.249 34.95,44.249 38.899,48.199 34.95,52.148 34.95,52.149
TP-SENS-RX3 on Top Layer "NONET_L04_P-001" (solid, pour order 68): 22.499,48.199 26.448,44.249 26.45,44.249 30.399,48.199 26.45,52.148 26.45,52.149
TP-SENS-RX3 on Top Layer "NONET_L04_P-001" (solid, pour order 67): 13.999,48.199 17.948,44.249 17.95,44.249 21.899,48.199 17.95,52.148 17.95,52.149
TP-SENS-RX3 on Top Layer "NONET_L04_P-001" (solid, pour order 66): 5.499,48.199 9.448,44.249 9.45,44.249 13.399,48.199 9.45,52.148 9.45,52.149
TP-SENS-RX3 on Top Layer "NONET_L04_P-001" (solid, pour order 65): 0.951,44.249 4.9,48.198 4.9,48.2 0.951,52.149
TP-SENS-RX2 on Top Layer "NONET_L04_P-001" (solid, pour order 64): 128.449,60.648 124.5,56.699 124.5,56.696 128.449,52.748
TP-SENS-RX2 on Top Layer "NONET_L04_P-001" (solid, pour order 63): 115.999,56.699 119.948,52.749 119.95,52.749 123.899,56.699 119.95,60.648 119.95,60.649
TP-SENS-RX2 on Top Layer "NONET_L04_P-001" (solid, pour order 62): 107.499,56.699 111.448,52.749 111.45,52.749 115.399,56.699 111.45,60.648 111.45,60.649
TP-SENS-RX2 on Top Layer "NONET_L04_P-001" (solid, pour order 61): 98.999,56.699 102.948,52.749 102.95,52.749 106.899,56.699 102.95,60.648 102.95,60.649
TP-SENS-RX2 on Top Layer "NONET_L04_P-001" (solid, pour order 60): 90.499,56.699 94.448,52.749 94.45,52.749 98.399,56.699 94.45,60.648 94.45,60.649
TP-SENS-RX2 on Top Layer "NONET_L04_P-001" (solid, pour order 58): 73.499,56.699 77.448,52.749 77.45,52.749 81.399,56.699 77.45,60.648 77.45,60.649
TP-SENS-RX2 on Top Layer "NONET_L04_P-001" (solid, pour order 57): 64.999,56.699 68.948,52.749 68.95,52.749 72.899,56.699 68.95,60.648 68.95,60.649
TP-SENS-RX2 on Top Layer "NONET_L04_P-001" (solid, pour order 56): 56.499,56.699 60.448,52.749 60.45,52.749 64.399,56.699 60.45,60.648 60.45,60.649
TP-SENS-RX2 on Top Layer "NONET_L04_P-001" (solid, pour order 55): 47.999,56.699 51.948,52.749 51.95,52.749 55.899,56.699 51.95,60.648 51.95,60.649
TP-SENS-RX2 on Top Layer "NONET_L04_P-001" (solid, pour order 54): 39.499,56.699 43.448,52.749 43.45,52.749 47.399,56.699 43.45,60.648 43.45,60.649
TP-SENS-RX2 on Top Layer "NONET_L04_P-001" (solid, pour order 53): 30.999,56.699 34.948,52.749 34.95,52.749 38.899,56.699 34.95,60.648 34.95,60.649
TP-SENS-RX2 on Top Layer "NONET_L04_P-001" (solid, pour order 52): 22.499,56.699 26.448,52.749 26.45,52.749 30.399,56.699 26.45,60.648 26.45,60.649
TP-SENS-RX2 on Top Layer "NONET_L04_P-001" (solid, pour order 51): 13.999,56.699 17.948,52.749 17.95,52.749 21.899,56.699 17.95,60.648 17.95,60.649
TP-SENS-RX2 on Top Layer "NONET_L04_P-001" (solid, pour order 50): 5.499,56.699 9.448,52.749 9.45,52.749 13.399,56.699 9.45,60.648 9.45,60.649
TP-SENS-RX2 on Top Layer "NONET_L04_P-001" (solid, pour order 49): 0.951,52.749 4.9,56.698 4.9,56.7 0.951,60.649
TP-SENS-RX1 on Top Layer "NONET_L04_P-001" (solid, pour order 48): 128.449,69.148 124.5,65.199 124.5,65.196 128.449,61.248
TP-SENS-RX1 on Top Layer "NONET_L04_P-001" (solid, pour order 47): 115.999,65.199 119.948,61.249 119.95,61.249 123.899,65.199 119.95,69.148 119.95,69.149
TP-SENS-RX1 on Top Layer "NONET_L04_P-001" (solid, pour order 46): 107.499,65.199 111.448,61.249 111.45,61.249 115.399,65.199 111.45,69.148 111.45,69.149
TP-SENS-RX1 on Top Layer "NONET_L04_P-001" (solid, pour order 45): 98.999,65.199 102.948,61.249 102.95,61.249 106.899,65.199 102.95,69.148 102.95,69.149
TP-SENS-RX1 on Top Layer "NONET_L04_P-001" (solid, pour order 44): 90.499,65.199 94.448,61.249 94.45,61.249 98.399,65.199 94.45,69.148 94.45,69.149
TP-SENS-RX1 on Top Layer "NONET_L04_P-001" (solid, pour order 42): 73.499,65.199 77.448,61.249 77.45,61.249 81.399,65.199 77.45,69.148 77.45,69.149
TP-SENS-RX1 on Top Layer "NONET_L04_P-001" (solid, pour order 41): 64.999,65.199 68.948,61.249 68.95,61.249 72.899,65.199 68.95,69.148 68.95,69.149
TP-SENS-RX1 on Top Layer "NONET_L04_P-001" (solid, pour order 40): 56.499,65.199 60.448,61.249 60.45,61.249 64.399,65.199 60.45,69.148 60.45,69.149
TP-SENS-RX1 on Top Layer "NONET_L04_P-001" (solid, pour order 39): 47.999,65.199 51.948,61.249 51.95,61.249 55.899,65.199 51.95,69.148 51.95,69.149
TP-SENS-RX1 on Top Layer "NONET_L04_P-001" (solid, pour order 38): 39.499,65.199 43.448,61.249 43.45,61.249 47.399,65.199 43.45,69.148 43.45,69.149
TP-SENS-RX1 on Top Layer "NONET_L04_P-001" (solid, pour order 37): 30.999,65.199 34.948,61.249 34.95,61.249 38.899,65.199 34.95,69.148 34.95,69.149
TP-SENS-RX1 on Top Layer "NONET_L04_P-001" (solid, pour order 36): 22.499,65.199 26.448,61.249 26.45,61.249 30.399,65.199 26.45,69.148 26.45,69.149
TP-SENS-RX1 on Top Layer "NONET_L04_P-001" (solid, pour order 35): 13.999,65.199 17.948,61.249 17.95,61.249 21.899,65.199 17.95,69.148 17.95,69.149
TP-SENS-RX1 on Top Layer "NONET_L04_P-001" (solid, pour order 34): 5.499,65.199 9.448,61.249 9.45,61.249 13.399,65.199 9.45,69.148 9.45,69.149
TP-SENS-RX1 on Top Layer "NONET_L04_P-001" (solid, pour order 33): 0.951,61.249 4.9,65.198 4.9,65.2 0.951,69.149
TP-SENS-RX0 on Top Layer "NONET_L04_P-001" (solid, pour order 31): 115.999,73.7 119.948,69.75 119.95,69.75 119.95,69.751 123.899,73.7 119.95,77.649 119.95,77.65
TP-SENS-RX0 on Top Layer "NONET_L04_P-001" (solid, pour order 30): 107.499,73.7 111.448,69.75 111.45,69.75 111.45,69.751 115.399,73.7 111.45,77.649 111.45,77.65
TP-SENS-RX0 on Top Layer "NONET_L04_P-001" (solid, pour order 29): 98.999,73.7 102.948,69.75 102.95,69.75 102.95,69.751 106.899,73.7 102.95,77.649 102.95,77.65
TP-SENS-RX0 on Top Layer "NONET_L04_P-001" (solid, pour order 28): 90.499,73.7 94.448,69.75 94.45,69.75 94.45,69.751 98.399,73.7 94.45,77.649 94.45,77.65
TP-SENS-RX0 on Top Layer "NONET_L04_P-001" (solid, pour order 27): 81.999,73.7 85.948,69.75 85.95,69.75 85.95,69.751 89.899,73.7 85.95,77.649 85.95,77.65
TP-SENS-RX0 on Top Layer "NONET_L04_P-001" (solid, pour order 26): 73.499,73.7 77.448,69.75 77.45,69.75 77.45,69.751 81.399,73.7 77.45,77.649 77.45,77.65
TP-SENS-RX0 on Top Layer "NONET_L04_P-001" (solid, pour order 25): 64.999,73.7 68.948,69.75 68.95,69.75 68.95,69.751 72.899,73.7 68.95,77.649 68.95,77.65
TP-SENS-RX0 on Top Layer "NONET_L04_P-001" (solid, pour order 24): 56.499,73.7 60.448,69.75 60.45,69.75 60.45,69.751 64.399,73.7 60.45,77.649 60.45,77.65
TP-SENS-RX0 on Top Layer "NONET_L04_P-001" (solid, pour order 23): 47.999,73.7 51.948,69.75 51.95,69.75 51.95,69.751 55.899,73.7 51.95,77.649 51.95,77.65
TP-SENS-RX0 on Top Layer "NONET_L04_P-001" (solid, pour order 22): 39.499,73.7 43.448,69.75 43.45,69.75 43.45,69.751 47.399,73.7 43.45,77.649 43.45,77.65
TP-SENS-RX0 on Top Layer "NONET_L04_P-001" (solid, pour order 21): 30.999,73.7 34.948,69.75 34.95,69.75 34.95,69.751 38.899,73.7 34.95,77.649 34.95,77.65
TP-SENS-RX0 on Top Layer "NONET_L04_P-001" (solid, pour order 20): 22.499,73.7 26.448,69.75 26.45,69.75 26.45,69.751 30.399,73.7 26.45,77.649 26.45,77.65
TP-SENS-RX0 on Top Layer "NONET_L04_P-001" (solid, pour order 19): 13.999,73.7 17.948,69.75 17.95,69.75 17.95,69.751 21.899,73.7 17.95,77.649 17.95,77.65
TP-SENS-RX0 on Top Layer "NONET_L04_P-001" (solid, pour order 18): 5.499,73.7 9.448,69.75 9.45,69.75 9.45,69.751 13.399,73.7 9.45,77.649 9.45,77.65
TP-SENS-RX0 on Top Layer "NONET_L04_P-001" (solid, pour order 16): 0.951,69.75 4.9,73.699 4.9,73.701 0.951,77.65
TP-SENS-TX0 on Top Layer "NONET_L04_P-001" (solid, pour order 4): 5.2,73.4 1.251,69.451 1.251,69.449 5.2,65.5 9.149,69.449 9.15,69.449
TP-SENS-TX0 on Top Layer "NONET_L04_P-001" (solid, pour order 13): 1.25,77.949 5.199,74 5.201,74 9.15,77.949
TP-SENS-TX0 on Top Layer "NONET_L04_P-001" (solid, pour order 11): 5.2,13.901 1.25,9.952 1.25,9.95 1.251,9.95 5.2,6.001 9.149,9.95 9.15,9.95
TP-SENS-TX0 on Top Layer "NONET_L04_P-001" (solid, pour order 10): 5.2,22.401 1.25,18.452 1.25,18.45 1.251,18.45 5.2,14.501 9.149,18.45 9.15,18.45
TP-SENS-TX0 on Top Layer "NONET_L04_P-001" (solid, pour order 9): 5.2,30.901 1.25,26.952 1.25,26.95 1.251,26.95 5.2,23.001 9.149,26.95 9.15,26.95
TP-SENS-TX0 on Top Layer "NONET_L04_P-001" (solid, pour order 8): 5.2,39.401 1.25,35.452 1.25,35.45 1.251,35.45 5.2,31.501 9.149,35.45 9.15,35.45
TP-SENS-TX0 on Top Layer "NONET_L04_P-001" (solid, pour order 7): 5.2,47.901 1.25,43.952 1.25,43.95 1.251,43.95 5.2,40.001 9.149,43.95 9.15,43.95
TP-SENS-TX0 on Top Layer "NONET_L04_P-001" (solid, pour order 6): 5.2,56.401 1.25,52.452 1.25,52.45 1.251,52.45 5.2,48.501 9.149,52.45 9.15,52.45
TP-SENS-TX0 on Top Layer "NONET_L04_P-001" (solid, pour order 5): 5.2,64.901 1.25,60.952 1.25,60.95 1.251,60.95 5.2,57.001 9.149,60.95 9.15,60.95
GND on Bottom Layer "NONET_L04_P-001" (solid, pour order 303): 128.45,77.969 128.45,1.482 128.427,1.46 0.95,1.46 0.95,77.95
EMI-GND on Bottom Layer "NONET_L04_P-001" (solid, pour order 301): 64.237,77.062 65.137,77.062 65.137,77.712 65.387,77.962 65.387,79.096 63.986,79.096 63.986,77.947 64.237,77.696

## Other copper
Top Layer:
  drawing of 272 lines, arcs and shapes, not listed
Bottom Layer:
  drawing of 272 lines, arcs and shapes, not listed

## Silkscreen, mask and mechanical layers (free items; w line width, h text height)
Bottom Overlay:
  text "OV Tech GmbH" at 70.9,71.316 h1.4
  text "TP-SENSOR-PCB-R01" at 70.85,70.213 h1.2
Board outline:
  lines w0.1: 0,22.4 0,4.1 ccw(c4.1,4.1) 4.1,0 50.7,0 ; 0,22.4 0,75.3 cw(c4.1,75.3) 4.1,79.4 125.3,79.4 cw(c125.3,75.3) 129.4,75.3 129.4,22.4 ; 0,22.4 14,22.4 14,67.4 115.4,67.4 115.4,22.4 129.4,22.4 ; 50.7,0 78.7,0 ; 50.7,0 50.7,9.7 78.7,9.7 78.7,0 ; 78.7,0 125.3,0 ccw(c125.3,4.1) 129.4,4.1 129.4,22.4
  text "Keepout: Mounting Frame}" at 28.9,71.766 h3.5
  text "Max component Height: 1.2mm}" at 20.2,58.216 h3.5
  text "Switch}" at 54.4,4.5 h3.5
Matrix outline:
  drawing of 550 lines, arcs and shapes, not listed